# Altium PCB AV Channel.PcbDoc
Units mil, origin at the board's own origin, x right, y up, seen from the top; angles counter-clockwise.
Board outline 3149.61 x 1929.13 mil, 2 copper layers (Top Layer, Bottom Layer); 48 components, 31 nets, 152 pads, 28 vias.
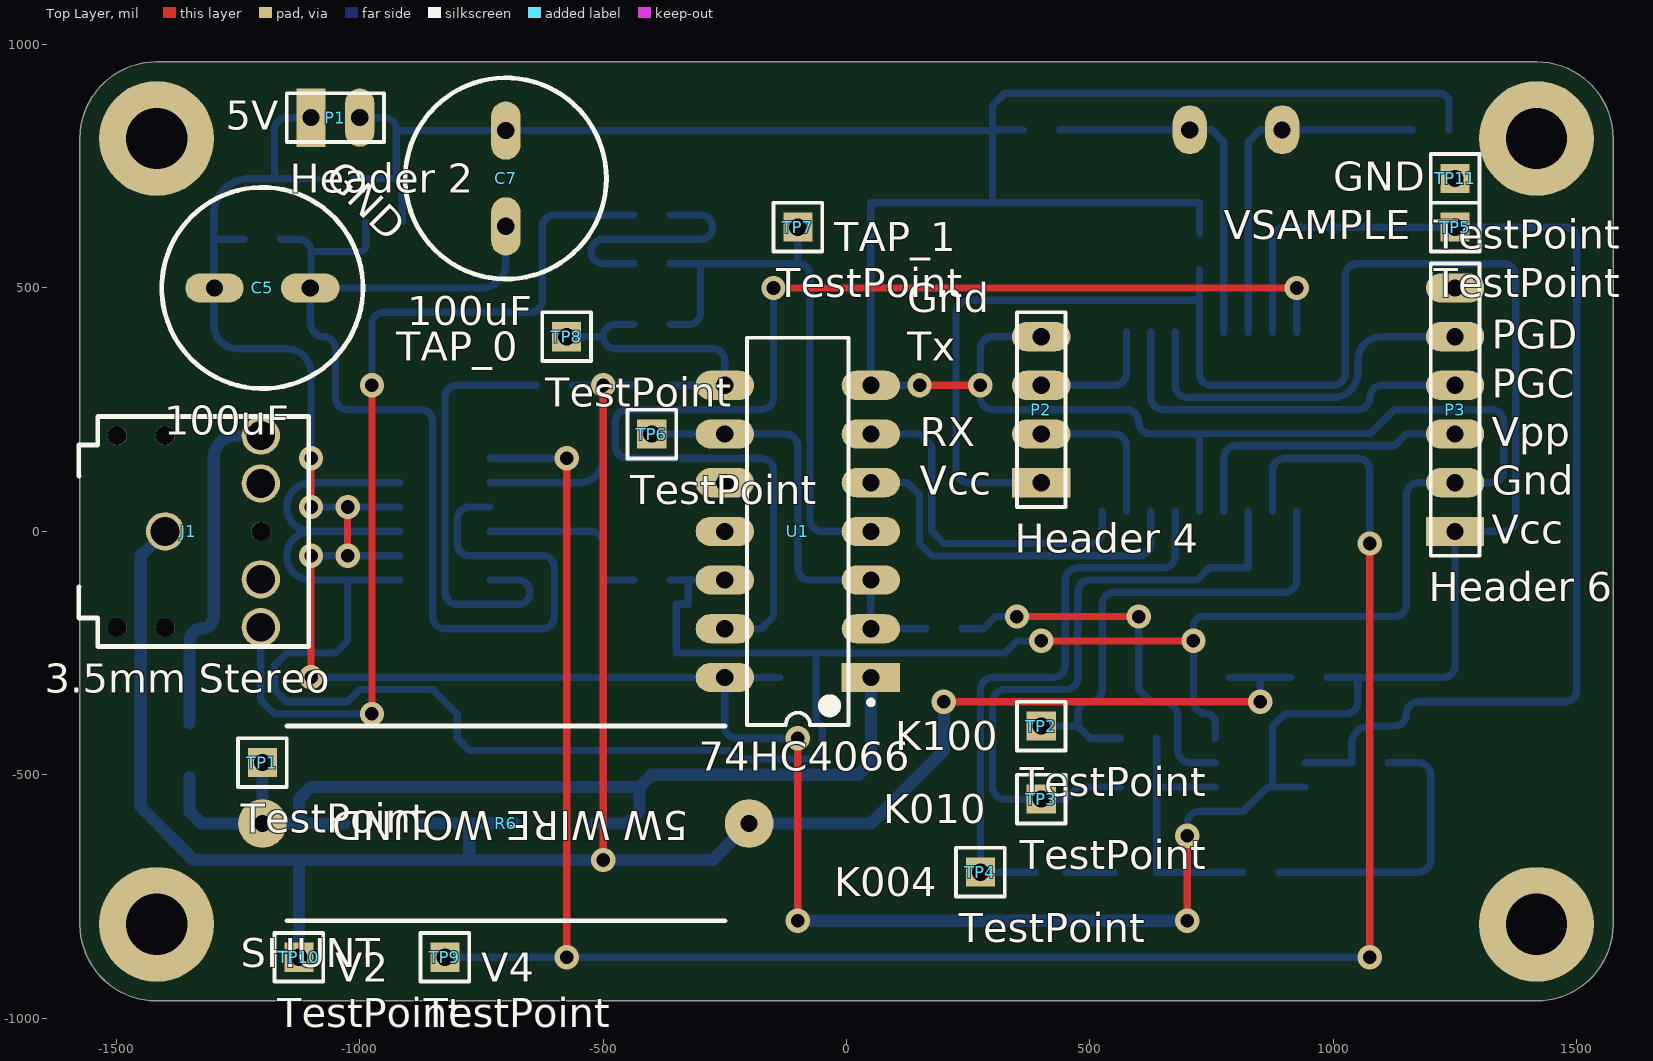
[diagram p0: Top Layer view]
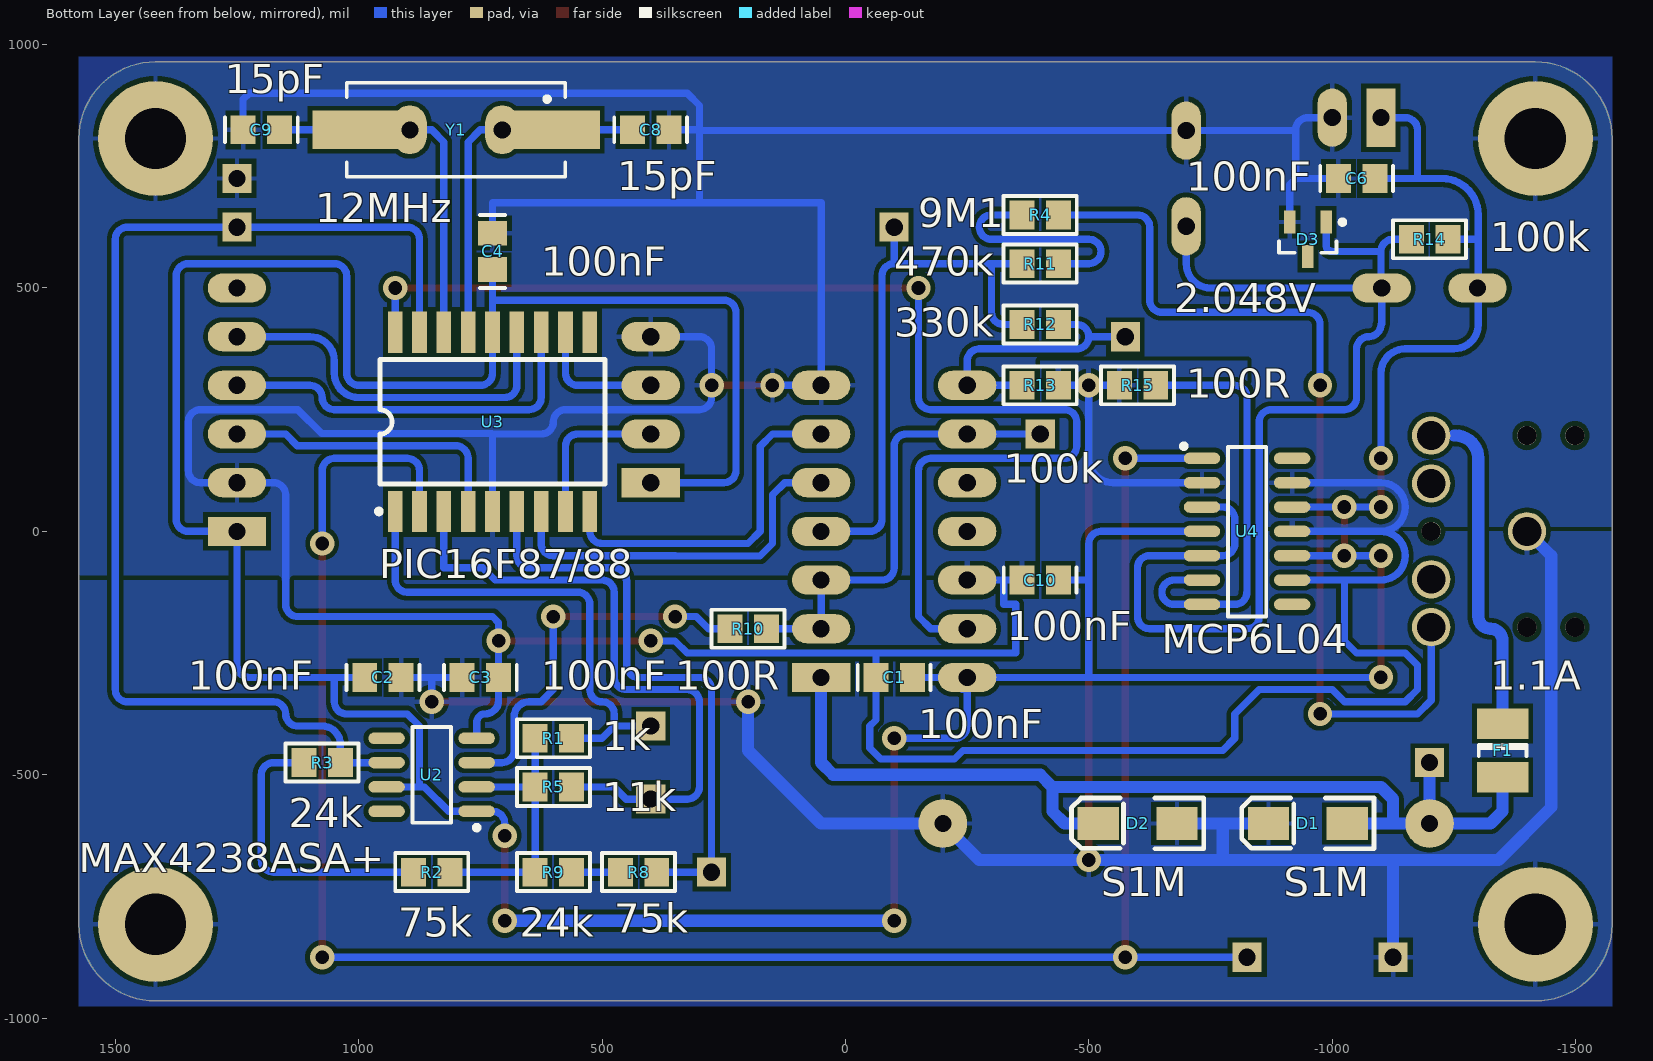
[diagram p1: Bottom Layer view, seen from below]

## Layer stack, top to bottom
Top Layer: signal copper 1.4
Dielectric: dielectric 12.6, FR-4, Dk 4.8
Bottom Layer: signal copper 1.4

## Board outline
-1574.8,-807.09 -1574.8,807.09 cw(c-1417.32,807.09) -1417.32,964.57 1417.32,964.57 cw(c1417.32,807.09) 1574.8,807.09 1574.8,-807.09 cw(c1417.32,-807.09) 1417.32,-964.57 -1417.32,-964.57 cw(c-1417.32,-807.09)

## Design rules (kind name [scope] priority, off if disabled: settings)
Clearance [All] p1: gap=10
PolygonConnect [All] p1: connectstyle=Relief reliefconductorwidth=10 reliefentries=4 polygonreliefangle="90 Angle" airgapwidth=10
RoomDefinition "AV Channel" [InComponentClass('AV Channel')] p1: confinementstyle=ConfineIn formatcopy=TRUE lockcomponents=FALSE outline -1600,-1000 1600,-1000 1600,1000 -1600,1000
RoutingVias [All] p1: holewidth=28 width=50 viastyle="Through Hole" minholewidth=28 minwidth=50 maxholewidth=28 maxwidth=50
SilkToSilkClearance [All] p1 off: silktosilkclearance=10
SilkToSolderMaskClearance [IsPad] p1 off: minsilkscreentomaskgap=10 clearancetoexposedcopper=TRUE
SolderMaskExpansion [All] p1: expansion=4
Width [All] p1: maxlimit=150 minlimit=10 preferedwidth=10
26 further rules are at their usual default settings.

## Components (designator, comment, footprint, x,y, rotation, side; value= is the part's Value field where it differs from the comment)
C1 "100nF" "CAP (3D) - 0805" -100,-300 r180 bottom
C2 "100nF" "CAP (3D) - 0805" 950,-300 r0 bottom
C3 "100nF" "CAP (3D) - 0805" 750,-300 r0 bottom
C4 "100nF" "CAP (3D) - 0805" 725,575 r90 bottom
C5 "100uF" RB5-10.5 -1200,500 r0 top
C6 "100nF" "CAP (3D) - 0805" -1050,725 r180 bottom
C7 "100uF" RB5-10.5 -700,725 r90 top
C8 "15pF" "CAP (3D) - 0805" 400,825 r180 bottom
C9 "15pF" "CAP (3D) - 0805" 1200,825 r0 bottom
C10 "100nF" "CAP (3D) - 0805" -400,-100 r0 bottom
D1 "S1M" DO-214AC -950,-600 r0 bottom
D2 "S1M" DO-214AC -600,-600 r0 bottom
D3 "2.048V" SOT23-3L -950,600 r270 bottom
F1 "1.1A" "LITTELFUSE 1210" -1350,-450 r270 bottom
J1 "3.5mm Stereo" "3.5MM pcb mouNt" -1400,0 r180 top
P1 "Header 2" HDR1X2 -1100,850 r0 top
P2 "Header 4" HDR1X4 400,100 r90 top
P3 "Header 6" HDR1X6 1250,0 r90 top
R1 "1k" "RES (3D) - 0805" 600,-425 r0 bottom
R2 "75k" "RES (3D) - 0805" 850,-700 r0 bottom
R3 "24k" "RES (3D) - 0805" 1075,-475 r180 bottom
R4 "9M1" "RES (3D) - 0805" -400,650 r0 bottom
R5 "11k" "RES (3D) - 0805" 600,-525 r0 bottom
R6 "SHUNT" "5W WW" -700,-600 r180 top
R8 "75k" "RES (3D) - 0805" 425,-700 r0 bottom
R9 "24k" "RES (3D) - 0805" 600,-700 r0 bottom
R10 "100R" "RES (3D) - 0805" 200,-200 r0 bottom
R11 "470k" "RES (3D) - 0805" -400,550 r0 bottom
R12 "330k" "RES (3D) - 0805" -400,425 r180 bottom
R13 "100k" "RES (3D) - 0805" -400,300 r180 bottom
R14 "100k" "RES (3D) - 0805" -1200,600 r180 bottom
R15 "100R" "RES (3D) - 0805" -600,300 r0 bottom
TP1 "TestPoint" TP -1200,-475 r0 top
TP2 "TestPoint" TP 400,-400 r0 top
TP3 "TestPoint" TP 400,-550 r0 top
TP4 "TestPoint" TP 275,-700 r0 top
TP5 "TestPoint" TP 1250,625 r0 top
TP6 "TestPoint" TP -400,200 r0 top
TP7 "TestPoint" TP -100,625 r0 top
TP8 "TestPoint" TP -575,400 r0 top
TP9 "TestPoint" TP -825,-875 r0 top
TP10 "TestPoint" TP -1125,-875 r90 top
TP11 "TestPoint" TP 1250,725 r90 top
U1 "74HC4066" DIP-14 -100,0 r180 top
U2 "MAX4238ASA+" SO-8 850,-500 r0 bottom
U3 "PIC16F87/88" SOIC-18 725,225 r180 bottom
U4 "MCP6L04" SO-14 -825,0 r180 bottom
Y1 "12MHz" HC49/4H_SMX 800,825 r0 bottom

## Footprints (in the part's own frame and the unit in brackets; to place one, negate y for a bottom-side part, rotate by r counter-clockwise, add the part's x,y. Pads: shape width x height; smd on the part's side, far side on the other; paste and mask are expansions set on the pad)
"3.5MM pcb mouNt" [mm]
  round 1 hole 1: 0(-5,0) 0(0,5) 0(0,-5) 0(2.5,5) 0(2.5,-5)
  round 2 hole 1.5: 1(0,0) 2(-5,5) 3(-5,2.5) 4(-5,-2.5) 5(-5,-5)
  silkscreen extent -7.5,-6.01 4.5,6.01, body extent -7.5,-6 6.55,6, height 5.52
"5W WW" [mil] "5W WIRE WOUND RESISTOR"
  round 100 hole 35: 1(-500,0) 2(500,0)
  silkscreen extent -450,-200 450,200
"CAP (3D) - 0805" [mm]
  rect 1.3x1.5 smd: 1(-0.95,0) 2(0.95,0)
  silkscreen extent -1.9,-0.65 1.9,0.65, body extent -1,-0.63 1,0.63, height 1
DIP-14 [mil] "DIP; 14 Leads; Row Spacing 7.62 mm; Pitch 2.54 mm"
  rect 120x60 hole 35.43: 1(-150,300)
  oval 120x60 hole 35.43: 2(-150,200) 3(-150,100) 4(-150,0) 5(-150,-100) 6(-150,-200) 7(-150,-300) 8(150,-300) 9(150,-200) 10(150,-100) 11(150,0) 12(150,100) 13(150,200) 14(150,300)
  silkscreen extent -155,-398 104,398, body extent -142,-398 142,398, height 200
DO-214AC [mil]
  rect 85x67 smd: 1(-81,0) 2(81,0)
  silkscreen extent -136,-52 136,52, body extent -79,-39 79,39, height 61
HC49/4H_SMX [mm] "Quartz Crystal, SM; Body 13.4 (inc. leads) x 4.9 mm (LxW max)"
  rect 5.5x2 smd: 1(-4.75,0) 2(4.75,0)
  silkscreen extent -5.7,-2.45 5.7,2.45, body extent -6.37,-2.35 6.33,2.35, height 4.2
HDR1X2 [mil] "Connector; Header; 2 Position"
  rect 60x120 hole 35.43: 1(0,0)
  oval 60x120 hole 35.43: 2(100,0)
  silkscreen extent -50,-50 150,50
HDR1X4 [mil] "Connector; Header; 4 Position"
  rect 60x120 hole 35.43: 1(0,0)
  oval 60x120 hole 35.43: 2(100,0) 3(200,0) 4(300,0)
  silkscreen extent -50,-50 350,50
HDR1X6 [mil] "Connector; Header; 6 Position"
  rect 60x120 hole 35.43: 1(0,0)
  oval 60x120 hole 35.43: 2(100,0) 3(200,0) 4(300,0) 5(400,0) 6(500,0)
  silkscreen extent -50,-50 550,50
"LITTELFUSE 1210" [mm] "Chip Capacitor; Body 3.2 x 2.5 mm (LxW typ)"
  rect 1.6x2.7 smd: 1(-1.4,0) 2(1.4,0)
  silkscreen extent -0.3,-1.25 0.3,1.25, body extent -1.61,-1.29 1.61,1.29, height 0.67
RB5-10.5 [mil] "Capacitor (Radial); 2 Leads"
  oval 120x60 hole 35.43: 1(-98.43,0) 2(98.43,0)
  silkscreen extent -207,-207 207,207
"RES (3D) - 0805" [mm]
  rect 1.3x1.5 smd: 1(-0.95,0) 2(0.95,0)
  silkscreen extent -1.91,-0.99 1.91,0.99, body extent -1,-0.63 1,0.63, height 1
SO-8 [mm] "SOIC, 8-Leads, Body 4.9x3.9mm, Pitch 1.27mm, IPC High Density"
  oval 1.9x0.6 smd: 1(-2.35,1.905) 2(-2.35,0.635) 3(-2.35,-0.635) 4(-2.35,-1.905) 5(2.35,-1.905) 6(2.35,-0.635) 7(2.35,0.635) 8(2.35,1.905)
  silkscreen extent -2.47,-2.5 1,2.88, body extent -2.9,-2.45 3.1,2.45, height 1.75
SO-14 [mm] "SOIC, 8-Leads, Body 4.9x3.9mm, Pitch 1.27mm, IPC High Density"
  oval 1.9x0.6 smd: 1(-2.35,3.81) 2(-2.35,2.54) 3(-2.35,1.27) 4(-2.35,0) 5(-2.35,-1.27) 6(-2.35,-2.54) 7(-2.35,-3.81) 8(2.35,-3.81) 9(2.35,-2.54) 10(2.35,-1.27) 11(2.35,0) 12(2.35,1.27) 13(2.35,2.54) 14(2.35,3.81)
  silkscreen extent -3.43,-4.44 1,4.57, body extent -3.1,-4.37 3.1,4.38, height 1.77
SOIC-18 [mil]
  rect 30x85 smd: 1(-200,-184.05) 2(-150,-184.05) 3(-100,-184.05) 4(-50,-184.05) 5(0,-184.05) 6(50,-184.05) 7(100,-184.05) 8(150,-184.05) 9(200,-184.05) 10(200,184.06) 11(150,184.06) 12(100,184.06) 13(50,184.06) 14(0,184.06) 15(-50,184.06) 16(-100,184.06) 17(-150,184.06) 18(-200,184.06)
  silkscreen extent -238,-189 231,128, body extent -236,-148 236,148, height 100
SOT23-3L [mm] "SOT23, 3-Leads, Body 2.9x1.3mm, Pitch 0.95mm, Lead Span 2.5mm, IPC High Density"
  rect 1.2x0.6 smd: 1(-0.9,0.95) 2(-0.9,-0.95) 3(0.9,0)
  silkscreen extent -1.02,-1.5 0.7,1.92, body extent -1.25,-1.5 1.25,1.5, height 1.12
TP [mil] "Connector; Header; 2 Position"
  rect 60x60 hole 35.43: 1(0,0)
  silkscreen extent -50,-50 50,50

## Part data
C1 C2 C3 C4 C6 C10: library part Cap, "Capacitor"
C5 C7: library part "Cap Pol", "CAPACITOR POLARISED TAG B CASE"
C8 C9: library part CAP, "CAPACITOR SMD 0402"
D1 D2: library part DIODE, "DIODE, POWER"
D3: library part "D Zener", "LM4040 2.048V Reference"
F1: library part "Fuse 2", "Fuse"
J1: library part "Phonejack Stereo SW", "3-Conductor Jack with 2 break contacts (normals) and 2 auxiliary make contacts"
P1: "Header, 2-Pin"
P2: "Header, 4-Pin"
P3: "Header, 6-Pin"
R1 R2 R3 R5 R8 R9 R10 R15: library part "RES SMD 0603", "RESISTOR SMD 0603"
R4 R11 R12 R13 R14: library part "RES SMD 0603 10k", "RESISTOR SMD 0603 10k"
R6: library part Res2, "Resistor"
U1: "Quadruple Bilateral Analog Switch"
U2: library part MAX495CSA, "Single Voltage-Feedback Operational Amplifier"
U3: "PIC16F88"
Y1: library part XTAL, "Crystal Oscillator"

## Free pads (board coordinates)
  round 236.22 hole 125.98: 0(-1417.32,-807.09) 0(-1417.32,807.09) 0(1417.32,-807.09) 0(1417.32,807.09)
  oval 70x100 hole 35: 1(705,825) 2(895,825)

## Via types
v1: diameter 50, hole 28, Top Layer to Bottom Layer, 28 vias

## Nets (pads, with @x,y where several pads share a name; then routed paths per layer and width w, separated by ;. In a path a pad name is that pad's centre, name@x,y a point inside that pad or via, vN(x,y) a via of type N, cw(c..) or ccw(c..) an arc to the next point about the centre after c; other vN are vias at no path point)
2V048: C2.1 C3.2 D1.2 D2.1 J1.1 pad.0@1417.32,-807.09 pad.0@-1417.32,-807.09 R6.1 R13.2 R15.2 TP10.1 U4.2 | length 5274.8
  Top Layer w15: v1(-500,-675) v1(-500,300) ; v1(200,-350) v1(850,-350)
  Bottom Layer w15: U4.2 -550,100 ccw(c-550,150) -500,150 v1(-500,300) ; R15.2 v1(-500,300) ; R13.2 v1(-500,300) ; C3.2 850,-300 ; v1(850,-350) 850,-300 ; C2.1 850,-300
  Bottom Layer w25: J1.1 -1450,-50 -1450,-566.48 -1341.48,-675 -1125,-675 ; TP10.1 -1125,-675 ; D1.2 -775,-600 ; D2.1 -775,-600 ; v1(200,-350) 200,-450 50,-600 R6.1 -275,-675 v1(-500,-675) -775,-675 ; -1125,-675 -775,-675 ; -775,-675 -775,-600
4V096: TP9.1 U3.2 U4.1 | length 4395.1
  Top Layer w15: v1(-575,-875) v1(-575,150) ; v1(1075,-875) v1(1075,-25)
  Bottom Layer w15: TP9.1 v1(-575,-875) v1(1075,-875) ; U4.1 v1(-575,150) ; U3.2 875,125 cw(c900,125) 900,150 1050,150 cw(c1050,125) 1075,125 v1(1075,-25)
AMPS_IN: F1.1 J1.5 | length 650.2
  Bottom Layer w25: F1.1 -1350,-225 cw(c-1325,-225) -1325,-200 ccw(c-1325,-175) -1300,-175 -1300,150 cw(c-1253.15,150) -1253.15,196.85 -1250,196.85
CHANNEL_SAMPLE: R3.2 TP5.1 U2.6 U3.17 | length 2428.7
  Bottom Layer w15: U3.17 875,600 cw(c900,600) 900,625 1475,625 cw(c1475,600) 1500,600 1500,-325 cw(c1475,-325) 1475,-350 1175,-350 ccw(c1175,-375) 1150,-375 cw(c1125,-375) 1125,-400 1075,-400 ccw(c1075,-437.4) 1037.6,-437.4 R3.2 U2.6
GND: C1.1 C3.1 C4.2 C6.1 C7.2 C8.2 C9.2 C10.2 D3.2 P1.2 P2.4 P3.2 pad.0@1417.32,807.09 pad.0@-1417.32,807.09 TP11.1 U1.7 U1.12 U2.4 U3.5 U4.9 U4.11 U4.13 | length 11050.2
  Top Layer w15: v1(150,300) v1(275,300) ; v1(400,-225) v1(712.6,-225)
  Bottom Layer w15: C6.1 -925,725 ; P1.2 -950,850 cw(c-950,825) -925,825 ; U4.9 -1025,-100 ; U4.11 -1100,0 ; U4.13 -1100,100 ccw(c-1100,50) -1150,50 ccw(c-1100,50) -1100,0 ; D3.2 -912.6,712.6 -925,725 ; C10.2 -325,-100 ; U1.12 -325,-100 ; v1(150,300) U1.7 50,675 300,675 ; C8.2 300,825 ; v1(400,-225) 350,-225 325,-250 -62.6,-250 ; P2.4 300,400 ccw(c300,375) 275,375 v1(275,300) 275,275 ccw(c300,275) 300,250 575,250 cw(c575,225) 600,225 ccw(c625,225) 625,200 725,200 ; U3.5 725,200 ; C4.2 725,675 300,675 ; U2.4 757.48,-392.48 ccw(c740,-392.48) 740,-375 cw(c740,-347.6) 712.6,-347.6 C3.1 v1(712.6,-225) 712.6,-187.4 725,-175 1125,-175 ccw(c1125,-150) 1150,-150 1150,75 cw(c1175,75) 1175,100 P3.2 1325,100 ccw(c1325,125) 1350,125 1350,225 ccw(c1325,225) 1325,250 1125,250 1075.98,200.98 725.98,200.98 725,200 ; C9.2 1237.4,887.6 1225,900 325,900 300,875 300,825 ; -1100,0 ccw(c-1100,-50) -1150,-50 ccw(c-1100,-50) -1100,-100 -1025,-100 ; -1025,-100 -1025,-225 -1050,-250 -1150,-250 -1175,-275 -1175,-325 -1150,-350 -1025,-350 -1000,-325 -850,-325 -800,-375 -800,-425 -775,-450 -241.61,-450 -224.11,-467.5 -72.5,-467.5 -50,-445 -50,-400 -62.6,-387.4 C1.1 -62.6,-250 ; -925,725 -925,825 ; -925,825 ccw(c-923.43,825) -923.43,823.43 C7.2 298.43,823.43 ccw(c298.43,825) 300,825 ; -325,-100 -325,-150 -350,-150 -350,-250 -62.6,-250 ; 300,675 300,825
I_SAMPLE: D1.1 D2.2 F1.2 R6.2 TP1.1 U1.1 | length 2109.7
  Bottom Layer w25: F1.2 -1350,-575 -1325,-600 R6.2 ; TP1.1 R6.2 ; D1.1 -1125,-600 ; D2.2 -450,-600 -425,-575 -425,-525 ; U1.1 50,-475 25,-500 -400,-500 -425,-525 ; R6.2 -1125,-600 ; -1125,-600 -1125,-550 -1100,-525 -425,-525
I_SELECT: U1.13 U3.18 | length 2558.4
  Top Layer w15: v1(-150,500) v1(925,500)
  Bottom Layer w15: U1.13 -175,-200 -150,-175 -150,125 ccw(c-175,125) -175,150 -450,150 cw(c-450,175) -475,175 -475,225 cw(c-450,225) -450,250 -175,250 ccw(c-175,275) -150,275 v1(-150,500) ; U3.18 v1(925,500)
ICSP_PGCLCK: P3.4 U3.12 | length 801.9
  Bottom Layer w15: U3.12 625,275 ccw(c650,275) 650,250 1050,250 ccw(c1050,275) 1075,275 cw(c1100,275) 1100,300 P3.4
ICSP_PGDATA: P3.5 U3.13 | length 780.4
  Bottom Layer w15: U3.13 675,300 ccw(c700,300) 700,275 1000,275 ccw(c1000,325) 1050,325 1050,350 cw(c1100,350) 1100,400 P3.5
ICSP_VPP: P3.3 U3.4 | length 608.8
  Bottom Layer w15: U3.4 775,150 cw(c800.98,150) 800.98,175.98 1125.98,175.98 1150,200 P3.3
K004: R8.1 TP4.1 U3.6 | length 1210.5
  Bottom Layer w15: R8.1 TP4.1 275,-325 cw(c300,-325) 300,-300 425,-300 ccw(c425,-275.98) 449.02,-275.98 449.02,-100.98 450,-100 cw(c475,-100) 475,-75 650,-75 ccw(c650,-50) 675,-50 U3.6
K010: R5.1 TP3.1 U3.3 | length 1331.3
  Bottom Layer w15: R5.1 475,-525 450,-550 TP3.1 325,-550 cw(c325,-525) 300,-525 300,-350 cw(c325,-350) 325,-325 450,-325 ccw(c450,-300) 475,-300 475,-125 cw(c500,-125) 500,-100 720,-100 745,-75 825,-75 U3.3
K100: R1.1 TP2.1 U3.1 | length 1021
  Bottom Layer w15: TP2.1 475,-400 ; R1.1 500,-425 475,-400 ; U3.1 925,-100 cw(c900,-100) 900,-125 550,-125 ccw(c550,-150) 525,-150 525,-325 cw(c500,-325) 500,-350 ccw(c500,-375) 475,-375 475,-400
NetC5_2: C5.2 C7.1 D3.1 R14.1 U4.3 U4.5 | length 2446.5
  Bottom Layer w15: R14.1 -1125,600 cw(c-1125,575) -1100,575 ; C5.2@-1100,501.57 -1100,575 ; D3.1 -987.4,587.6 cw(c-1000,587.6) -1000,575 -1100,575 ; U4.3 -775,50 ccw(c-775,25) -800,25 -800,-25 ccw(c-775,-25) -775,-50 U4.5 -650,-50 -625,-50 cw(c-625,-75) -600,-75 -600,-175 cw(c-625,-175) -625,-200 -825,-200 cw(c-825,-175) -850,-175 -850,225 ccw(c-875,225) -875,250 -1025,250 cw(c-1025,275) -1050,275 -1050,375 ccw(c-1075,375) -1075,400 cw(c-1075,425) -1100,425 cw(c-1100,426.57) -1101.57,426.57 C5.2 -750,500 ccw(c-750,550) -700,550 C7.1
NetR1_2: R1.2 R2.1 R5.2 R9.2 U2.2 | length 570.3
  Bottom Layer w15: R1.2 R5.2 ; U2.2 R5.2 ; R2.1 R9.2 R5.2
NetR2_2: R2.2 R3.1 | length 603.7
  Bottom Layer w15: R2.2 1175,-700 ccw(c1175,-675) 1200,-675 1200,-500 ccw(c1175,-500) 1175,-475 R3.1
NetR4_2: R4.2 R11.1 | length 482.3
  Bottom Layer w15: R11.1 -500,550 cw(c-500,575) -525,575 cw(c-500,575) -500,600 -300,600 ccw(c-300,625) -275,625 ccw(c-300,625) -300,650 R4.2
NetR8_2: R8.2 R9.1 | length 100.2
  Bottom Layer w15: R8.2@449.8,-700 R9.1@550,-700
NetR10_2: R10.2 U2.3 | length 792
  Top Layer w15: v1(350,-175) v1(600,-175)
  Bottom Layer w15: R10.2 281.2,-200 306.2,-175 v1(350,-175) ; v1(600,-175) 600,-325 625,-350 650,-350 cw(c650,-380.49) 680.49,-380.49 680.49,-450 ccw(c705.49,-450) 705.49,-475 U2.3
NetR15_1: R15.1 U4.6 U4.7 | length 901.4
  Bottom Layer w15: -825,-125 -825,275 cw(c-800,275) -800,300 R15.1 ; -824.51,-125.49 ccw(c-800,-125.49) -800,-150 U4.7 -675,-150 ccw(c-675,-125) -675,-100 U4.6
OSC1: C9.1 pad.2 U3.16 Y1.2 | length 738.9
  Bottom Layer w15: U3.16 825,800 850,825 Y1.2 C9.1
OSC2: C8.1 pad.1 U3.15 Y1.1 | length 738.9
  Bottom Layer w15: C8.1 Y1.1 750,825 775,800 U3.15
RX_TTL: P2.2 U3.8 | length 323.3
  Bottom Layer w15: P2.2 550,200 cw(c550,175) 575,175 U3.8
SAMPLE: R10.1 TP6.1 U1.2 U1.3 U1.9 | length 941.1
  Bottom Layer w15: TP6.1 U1.9 -125,200 cw(c-125,175) -100,175 -100,-75 ccw(c-75,-75) -75,-100 U1.3 U1.2 R10.1
TX_TTL: P2.3 U3.11 | length 273.3
  Bottom Layer w15: P2.3 550,300 ccw(c550,325) 575,325 U3.11
V_SELECT_0: U1.5 U3.7 | length 776.1
  Bottom Layer w15: U1.5 125,100 150,75 150,-25 175.49,-50.49 349.51,-50.49 ; 349.51,-50 600,-50 ccw(c600,-25) 625,-25 U3.7
V_SELECT_1: U1.6 U3.9 | length 725.9
  Bottom Layer w15: U1.6 150,200 175,175 175,0 200,-25 500,-25 ccw(c500,0) 525,0 U3.9
VCC: C1.2 C2.2 C4.1 C5.1 C6.2 C10.1 P1.1 P2.1 P3.1 R14.2 U1.14 U2.1 U2.7 U3.14 U4.4 U4.10 U4.12 | length 9158.4
  Top Layer w15: v1(-1100,-300) v1(-1100,-50) ; v1(-1100,50) v1(-1100,150) ; v1(-1025,-50) v1(-1025,50) ; v1(-100,-800) v1(-100,-425) ; v1(700,-800) v1(700,-625)
  Bottom Layer w15: R14.2 -1300,600 ; v1(-1100,-300) -500,-300 ; v1(-1100,-50) v1(-1025,-50) U4.10 ; v1(-1100,50) v1(-1025,50) U4.12 ; v1(-1100,150) -1100,325 ccw(c-1150,325) -1150,375 -1250,375 cw(c-1250,425) -1300,425 -1300,498.43 cw(c-1298.43,498.43) C5.1 -1300,501.57 -1300,600 ; P1.1 -1150,850 ccw(c-1150,825) -1175,825 -1175,725 ; C6.2 -1175,725 ; U4.4 -525,0 cw(c-525,-25) -500,-25 -500,-100 ; C10.1 -500,-100 ; U1.14@-239.64,-325 -214.64,-300 C1.2 ; v1(-100,-425) -225,-425 cw(c-225,-400) -250,-400 U1.14 -500,-300 ; P2.1 250,100 cw(c250,125) 225,125 225,450 cw(c250,450) 250,475 725,475 ; v1(700,-625) 700,-600 cw(c725,-600) 725,-575 U2.1 815,-575 865,-525 875,-525 ; C4.1 725,475 ; U2.7 875,-525 ; C2.2 1050,-300 ; -1300,600 -1300,650 cw(c-1225,650) -1225,725 -1175,725 ; -500,-300 -500,-100 ; 725,475 U3.14 725,325 ccw(c750,325) 750,300 999.51,300 ccw(c999.51,325) 1024.51,325 1024.51,524.51 cw(c1050,524.51) 1050,550 1350,550 cw(c1350,525) 1375,525 1375,25 cw(c1350,25) 1350,0 P3.1 1250,-275 cw(c1225,-275) 1225,-300 1050,-300 ; 875,-525 875,-400 900,-375 1025,-375 ccw(c1025,-350) 1050,-350 1050,-300
  Bottom Layer w25: v1(-100,-800) v1(700,-800)
VOLTS_IN: J1.2 R4.1 | length 1925.2
  Top Layer w15: v1(-975,-375) v1(-975,300)
  Bottom Layer w15: J1.2@-1200,-200 cw(c-1200,-196.85) J1.2 -1203.15,-346.85 -1175,-375 v1(-975,-375) ; v1(-975,300) -975,425 cw(c-950,425) -950,450 -650,450 ccw(c-650,475) -625,475 -625,625 cw(c-600,625) -600,650 R4.1
VTAP_0: R12.2 R13.1 TP8.1 U1.8 | length 593
  Bottom Layer w15: TP8.1 -500,400 ; R12.2 -475,425 ccw(c-475,400) -500,400 ; R13.1 U1.8 -250,350 ccw(c-275,350) -275,375 -475,375 cw(c-475,400) -500,400
VTAP_1: R11.2 R12.1 TP7.1 U1.4 | length 1193
  Bottom Layer w15: R12.1 -325,425 ccw(c-325,450) -300,450 -300,550 ; R11.2 -300,550 ; TP7.1 -100,550 ; U1.4 -50,0 cw(c-50,25) -75,25 -75,525 ccw(c-100,525) -100,550 ; -300,550 -100,550
pads on no net: D3.3 J1.0 J1.3 J1.4 P3.6 U1.10 U1.11 U2.5 U2.8 U3.10 U4.8 U4.14

## Polygon pours and split planes (outlines as drawn)
GND on Bottom Layer "Mechanical 3-No Net" (solid, pour order 5): -1575,975 -1575,0 -825,0 -825,350 -400,350 -400,-100 1575,-100 1575,975 -1575,975
2V048 on Bottom Layer "Mechanical 3-No Net" (solid, pour order 3): -1575,0 -1575,-975 1575,-975 1575,-100 -400,-100 -400,350 -600,350 -825,350 -825,0 -1575,0

## Silkscreen, mask and mechanical layers (free items; w line width, h text height)
Top Overlay:
  text "5V" at -1275,825 h60
  text "GND" at -1075,725 h60 r315
  text "GND" at 1000,700 h60
  text "VSAMPLE" at 775,600 h60
  text "TAP_1" at -25,575 h60
  text "Gnd" at 125,450 h60
  text "PGD" at 1325,375 h60
  text "TAP_0" at -925,350 h60
  text "Tx" at 125,350 h60
  text "PGC" at 1325,275 h60
  text "RX" at 150,175 h60
  text "Vpp" at 1325,175 h60
  text "Vcc" at 150,75 h60
  text "Gnd" at 1325,75 h60
  text "Vcc" at 1325,-25 h60
  text "K100" at 100,-450 h60
  text "K010" at 75,-600 h60
  text "K004" at -25,-750 h60
  text "V2" at -1050,-925 h60
  text "V4" at -750,-925 h60
Mechanical 1:
  the board outline again, w10

## Text inside footprints (layer, text, board x,y; h text height)
R6: Top Overlay "5W WIRE WOUND" at -325,-575 h60 r180